# Altium PCB Charger.PcbDoc
Units mil, origin at the board's own origin, x right, y up, seen from the top; angles counter-clockwise.
Board outline 2715 x 2400 mil, 2 copper layers (Top Layer, Bottom Layer); 10 components, 7 nets, 24 pads, 0 vias.
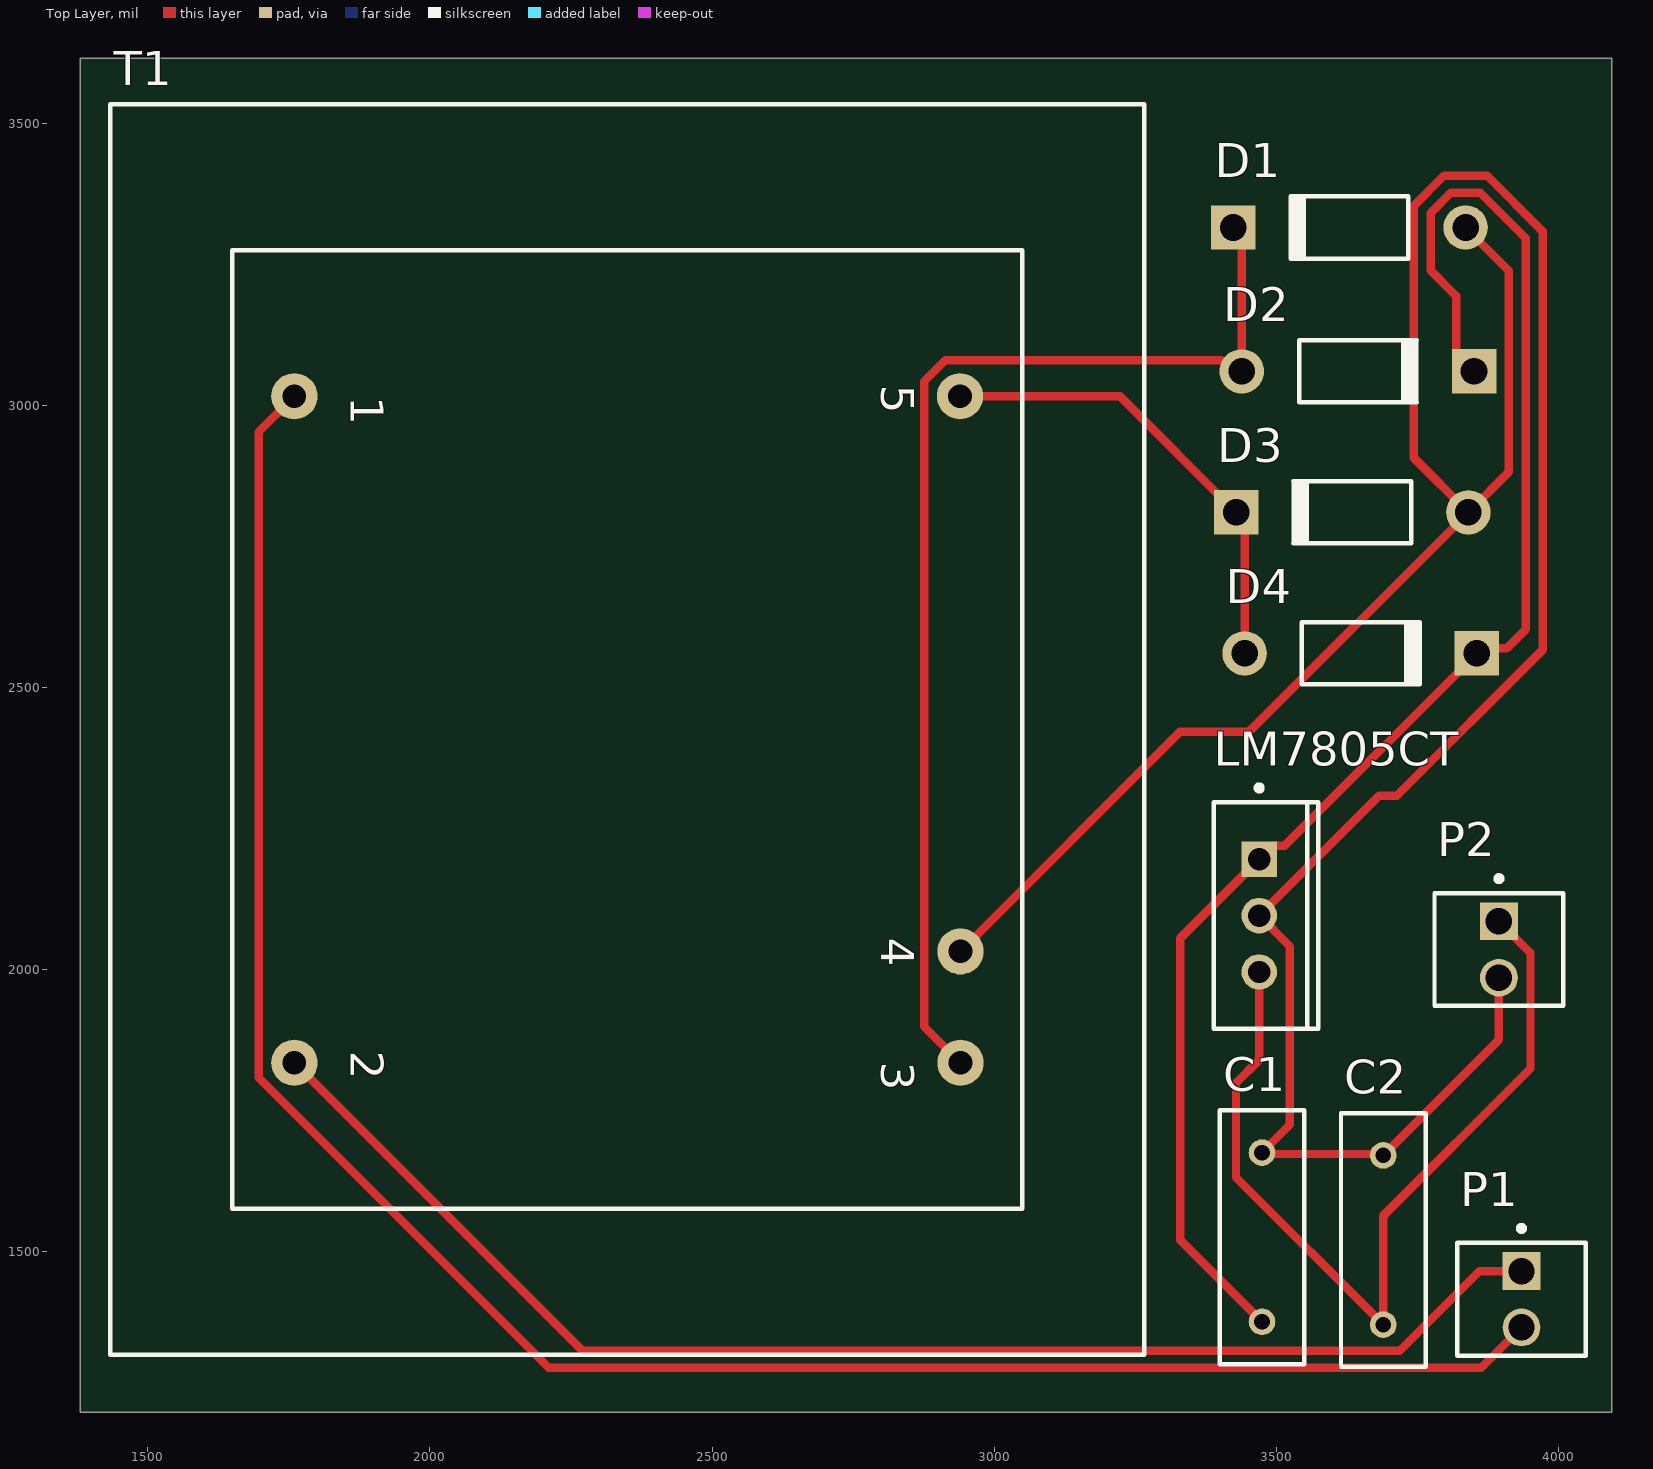
[diagram p0: Top Layer view]
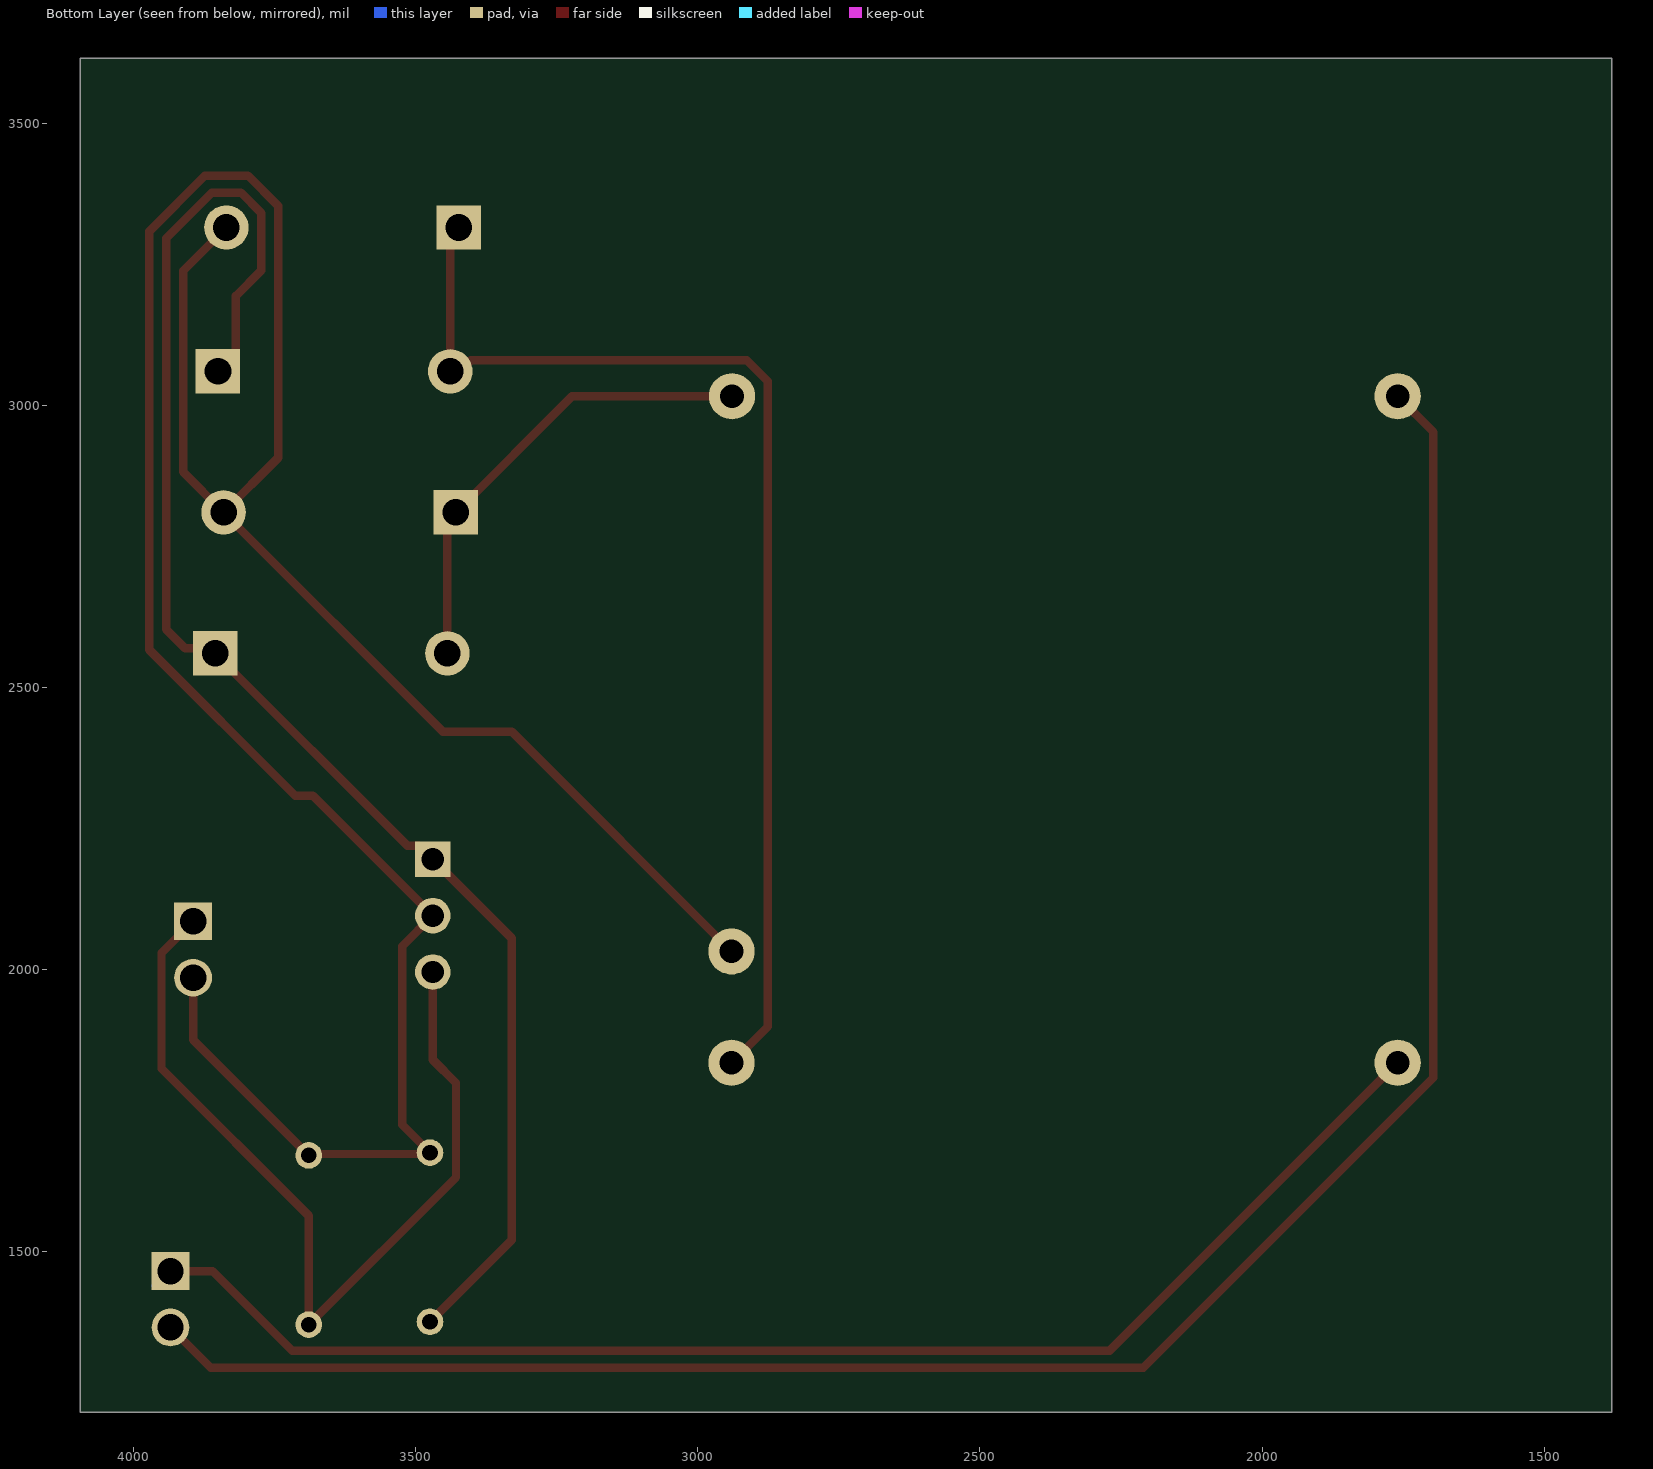
[diagram p1: Bottom Layer view, seen from below]

## Layer stack, top to bottom
Top Solder: solder mask 0.4, Solder Resist, Dk 3.5
Top Layer: signal copper 1.4
Dielectric 1: dielectric 12.6, FR-4, Dk 4.8
Bottom Layer: signal copper 1.4
Bottom Solder: solder mask 0.4, Solder Resist, Dk 3.5

## Board outline
1380,1215 4095,1215 4095,3615 1380,3615

## Design rules (kind name [scope] priority, off if disabled: settings)
Clearance [All] p1: gap=15 ignorepadtopadclearanceinfootprint=TRUE except(20: Arc-Hole Track-Hole SMDPad-Hole THPad-Hole Via-Hole Fill-Hole Poly-Hole Region-Hole Text-Hole)
PolygonConnect [All] p1: connectstyle=Relief reliefconductorwidth=10 reliefentries=4 polygonreliefangle="90 Angle" airgapwidth=10
RoutingVias [All] p1: holewidth=28 width=50 viastyle="Through Hole" minholewidth=28 minwidth=50 maxholewidth=28 maxwidth=50
SolderMaskExpansion [All] p1: expansion=4 istentingtop=FALSE
Width [All] p1: maxlimit=20 minlimit=10 preferedwidth=15 minimp=50.000000 maximp=50.000000 favimp=50.000000
30 further rules are at their usual default settings.

## Components (designator, comment, footprint, x,y, rotation, side; value= is the part's Value field where it differs from the comment)
C1 "Cap" RAD-0.3 3475,1525 r270 top value=1000uF
C2 "Cap" RAD-0.3 3690,1520 r270 top value=0.01uF
D1 "Diode 1N4007" DO-41 3630,3315 r180 top
D2 "Diode 1N4007" DO-41 3645,3060 r0 top
D3 "Diode 1N4007" DO-41 3635,2810 r180 top
D4 "Diode 1N4007" DO-41 3650,2560 r0 top
LM7805CT "LM7805CT" FAIR-TO-220-3 3470,2095 r0 top
P1 "22-27-2021" MOLX-22-27-2021_V 3935,1415 r270 top
P2 "22-27-2021" MOLX-22-27-2021_V 3895,2035 r270 top
T1 "Trans CT" TRF_5 2350,2425 r270 top

## Footprints (in the part's own frame and the unit in brackets; to place one, negate y for a bottom-side part, rotate by r counter-clockwise, add the part's x,y. Pads: shape width x height; smd on the part's side, far side on the other; paste and mask are expansions set on the pad)
DO-41 [mm] "Diode, Axial; Body 5.2 x 2.7 mm (LxDia. max), Lead Dia. 0.86 mm (max)"
  round 2 hole 1.2: 1(-5.23,0)
  rect 2x2 hole 1.2: 2(5.23,0)
  silkscreen extent -2.65,-1.41 2.75,1.4
FAIR-TO-220-3 [mm] "FM, 3-Leads, Body 10.2x4.7mm, Pitch 2.54mm"
  rect 1.6x1.6 hole 1: 1(0,2.54)
  round 1.6 hole 1: 2(0,0) 3(0,-2.54)
  silkscreen extent -2.04,-5.1 2.66,5.87, body extent -2.04,-5.1 2.66,5.1, height 18.95
MOLX-22-27-2021_V [mm] "Header, 2-Leads, Body 5.8x5.08mm"
  rect 1.7x1.7 hole 1.19: 1(-1.27,0)
  round 1.7 hole 1.19: 2(1.27,0)
  silkscreen extent -3.31,-2.9 2.54,2.9, body extent -2.54,-2.9 2.54,2.9, height 11.72
RAD-0.3 [mm] "Radial Cap, Thru-Hole; 2 Leads; 0.3 in Pin Spacing"
  round 1.2 hole 0.7: 1(-3.81,0) 2(3.81,0)
  silkscreen extent -5.71,-1.91 5.71,1.91
TRF_5 [mil] "Transformer; 5 Leads"
  round 82 hole 42: 1(-590.83,-590.42) 2(590.83,-590.42) 3(590.83,590.42) 4(393.33,590.42) 5(-590.83,589.58)
  silkscreen extent -1108,-917 1108,916

## Part data
C1 C2: "Capacitor", LatestRevisionDate=17-Jul-2002, LatestRevisionNote="Re-released for DXP Platform.", PackageDescription="Radial Cap, Thru-Hole; 2 Leads; 0.3 in Pin Spacing", PackageReference=RAD-0.3, Published=8-Jun-2000, Publisher="Altium Limited"
D1 D2 D3 D4: "1 Amp General Purpose Rectifier", Code_JEDEC=DO-204-AL, ComponentLink1Description="Manufacturer Link", ComponentLink1URL=http://www.fairchildsemi.com/, ComponentLink2Description=Datasheet, ComponentLink2URL=http://www.fairchildsemi.com/ds/1N%2F1N4001.pdf, DatasheetVersion=1998, LatestRevisionDate=17-Jul-2002, LatestRevisionNote="Re-released for DXP Platform.", PackageDescription="Diode, Axial; Body 5.2 x 2.7 mm (LxDia. max), Lead Dia. 0.86 mm (max)", PackageReference=DO-41, PackageVersion=Aug-1999, Published=8-Jun-2000, Publisher="Altium Limited"
LM7805CT: library part CMP-2000-04938-1, "Positive Voltage Regulator, 5 V, 1 A, -40 to 125 degC, 3-Pin TO-220, RoHS, Tube", Manufacturer=FairchildSemiconductor, Maximum Input Voltage=35V, Maximum Output Current=2.2(Typ)A, Maximum Quiescent Current=8mA, Operating Temperature=-40to125degC, Output Voltage=5V, Package=3TO-220AB, Package Description="3-Pin Through Hole Device, Body 10 x 4.5 mm, Pitch 2.54 mm", Package Reference=TO-220, Typical Dropout Voltage @ Current=2@1AV, Accuracy=±4%, Category=LinearRegulator, Datasheet URL=https://datasheet.ciiva.com/26904/lm7805ct-26904988.pdf, Datasheet Version=Aug-12, Line Regulation=100mV, Load Regulation=100mV, Manufacturer URL=https://www.fairchildsemi.com/, Mounting=ThroughHole, Number of Outputs=1, Output Type=Fixed, Package URL=https://www.fairchildsemi.com/package-drawings/TO/TO220B03.pdf, Packaging=Rail/Tube, Polarity=Positive, Rad Hard=No, Type=Linear
P1 P2: library part CMP-2000-05537-1, "Male Header, Pitch 2.54 mm, 1 x 2 Position, Height 11.7 mm, Tail Length 3.56 mm, 0 to 75 degC, RoHS, Bulk", Current - Max=4A, Manufacturer=Molex, Operating Temperature=0°Cto+75°C, Package Description="2-Leads Header, Body 5.08 x 5.8 mm, Pitch 2.54 mm", Package Version="Rev. BC, 02/2012", PartNumber=0022272021, Voltage - Max=250V, Contact material=Tinplatedbrass, Current rating=4A, Datasheet URL=http://www.molex.com/pdm_docs/sd/022272021_sd.pdf, Datasheet Version="Rev. F, 06/2009", Housing material=Nylon(UL94V-0), Manufacturer URL=http://www.molex.com/, Mounting Technology=ThroughHole, No. of Positions=2, No. of Rows=1, Orientation=Vertical, Package Reference=22-27-2021, Pitch=2.54mm, Voltage rating=250V
T1: "Center-Tapped Transformer (Coupled Inductor Model)", LatestRevisionDate=17-Jul-2002, LatestRevisionNote="Re-released for DXP Platform.", PackageDescription="Transformer; 5 Leads", PackageReference=TRF_5, Published=8-Jun-2000, Publisher="Altium Limited"

## Nets (pads, with @x,y where several pads share a name; then routed paths per layer and width w, separated by ;. In a path a pad name is that pad's centre, name@x,y a point inside that pad or via, vN(x,y) a via of type N, cw(c..) or ccw(c..) an arc to the next point about the centre after c; other vN are vias at no path point)
GND: C1.1 C2.1 D1.1 D3.1 LM7805CT.2 P2.2 T1.4 | length 5184.9
  Top Layer w15: T1.4 3329.89,2421.15 3452.05,2421.15 D3.1 ; D1.1 3912.78,3238.13 3912.78,2881.87 D3.1 ; P2.2 3895,1875 C2.1 3687.5,1672.5 3477.5,1672.5 C1.1 3524,1724 3524,2041 LM7805CT.2 3682.75,2307.75 3714.21,2307.75 3972.78,2566.31 3972.78,3308.05 3873.96,3406.87 3797.85,3406.87 3744.04,3353.05 3744.04,2906.87 D3.1
  Bottom Layer w15: D3.1@3840,2810 D3.1
NetC1_2: C1.2 D2.2 D4.2 LM7805CT.1 | length 2811.6
  Top Layer w15: C1.2 3330,1520 3330,2055 LM7805CT.1 3494,2219 3514.9,2219 D4.2 3864.89,2568.99 3908.99,2568.99 3942.78,2602.78 3942.78,3295.63 3861.53,3376.87 3810.28,3376.87 3774.04,3340.63 3774.04,3238.75 3819.04,3193.75 3819.04,3091.87 D2.2 D2.2@3860,3060
NetC2_2: C2.2 LM7805CT.3 P2.1 | length 1603.5
  Top Layer w15: LM7805CT.3 3465,1995 3470,1990 3470,1839.52 3428.88,1798.39 3428.88,1631.12 C2.2 3690,1562.97 3950.96,1823.94 3950.96,2029.04 P2.1
NetD1_2: D1.2 D2.1 T1.3 | length 2082.5
  Top Layer w15: T1.3 2940.42,1834.58 2940,1835 2939.58,1835 2876.08,1898.5 2876.08,3042.14 2913.28,3079.33 3402.51,3079.33 3421.85,3060 D2.1 3439.09,3300 D1.2
NetD3_2: D3.2 D4.1 T1.5 | length 846.8
  Top Layer w15: T1.5@2935,3015 2935.83,3015.83 T1.5 3223.26,3015.83 D3.2 3444.09,2795 D4.1 D4.1@3455,2560
NetP1_1: P1.1 T1.2 | length 2482
  Top Layer w15: T1.2 2269.87,1323.88 3719.4,1323.88 3860.53,1465 P1.1
  Bottom Layer w15: P1.1 P1.1@3960.96,1439.04
NetP1_2: P1.2 T1.1 | length 3715.5
  Top Layer w15: T1.1 1696.08,2952.33 1696.08,1807.86 2210.07,1293.88 3863.88,1293.88 P1.2

## Text inside footprints (layer, text, board x,y; h text height)
T1: Top Overlay "2" at 1859.58,1855.83 h59.06 r270; Top Overlay "3" at 2799.58,1835.83 h59.06 r270; Top Overlay "4" at 2799.58,2055.83 h59.06 r270; Top Overlay "1" at 1859.58,3015.83 h59.06 r270; Top Overlay "5" at 2799.58,3035.83 h59.06 r270